# Altium PCB VOLT_CONV_PCB.PcbDoc
Units mm, origin at the board's own origin, x right, y up, seen from the top; angles counter-clockwise.
Board outline 65 x 30 mm, 2 copper layers (Top Layer, Bottom Layer); 21 components, 8 nets, 45 pads, 456 vias.
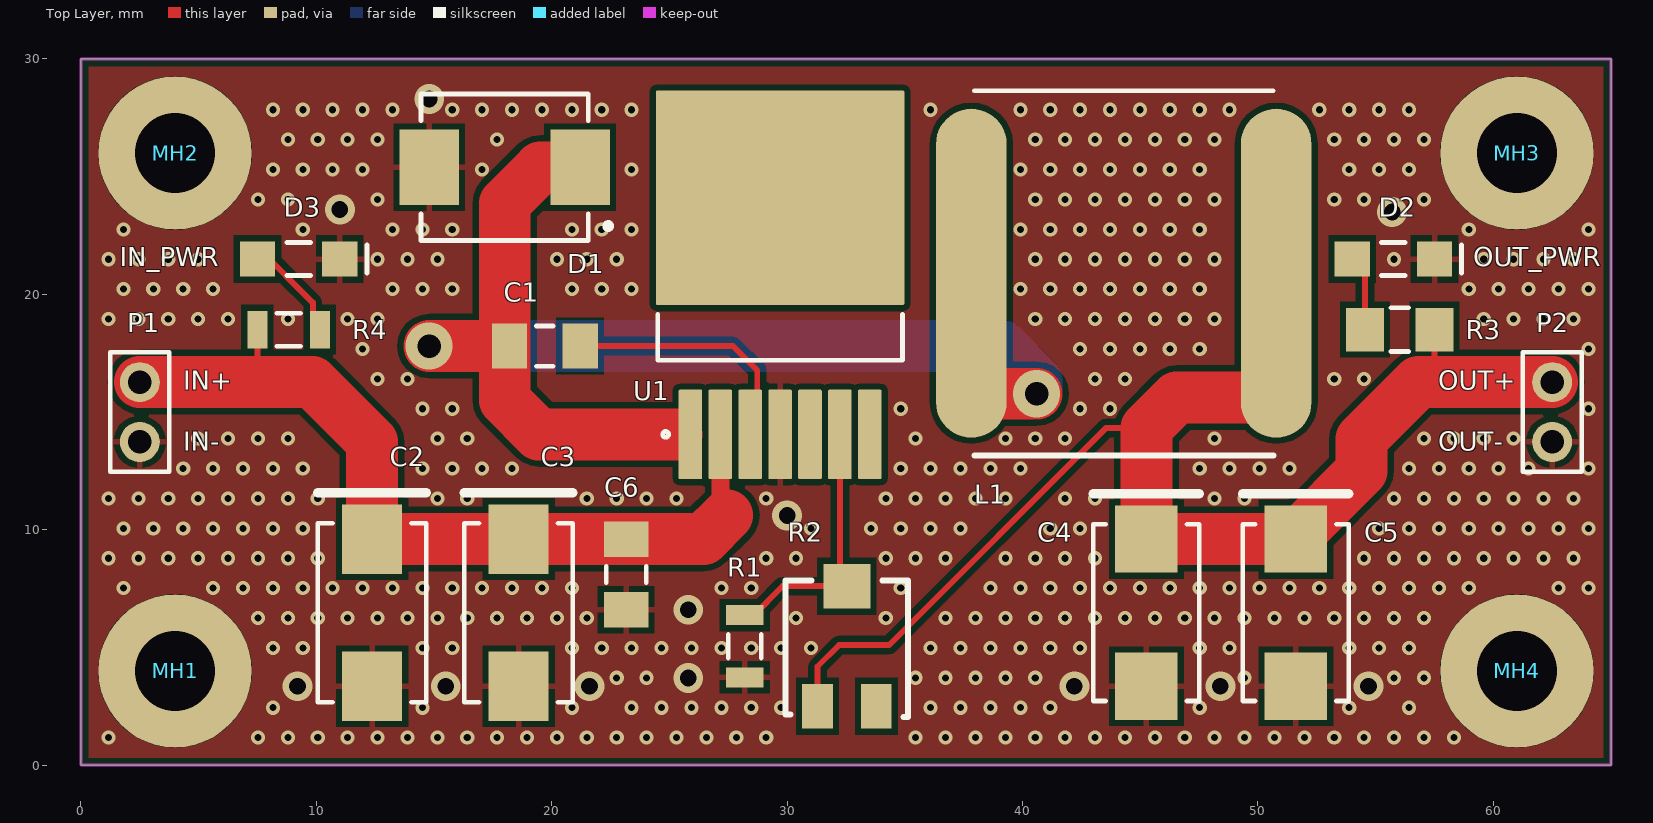
[diagram p0: Top Layer view]
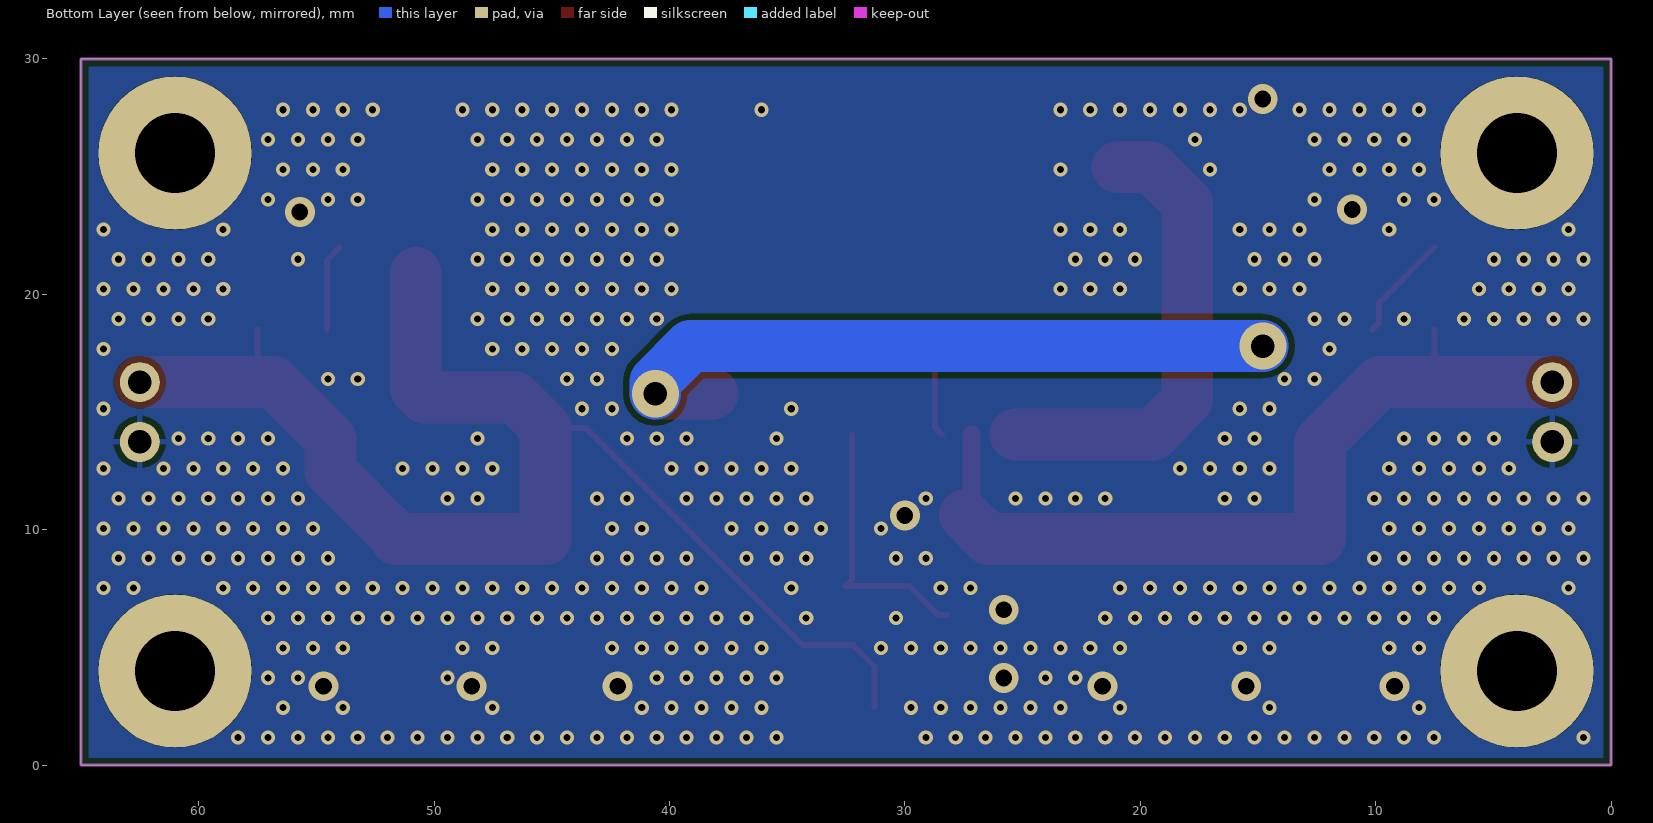
[diagram p1: Bottom Layer view, seen from below]
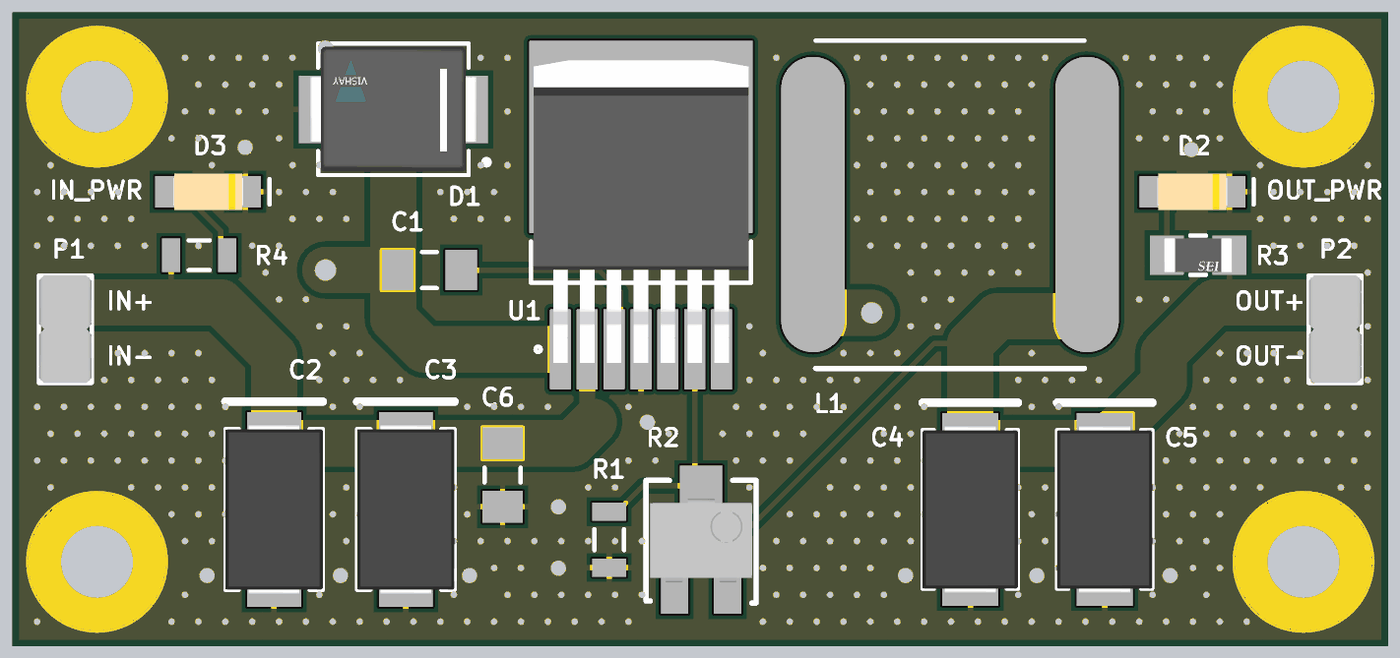
[diagram p2: 3D render of the assembled board from above, using the file's embedded part models]

## Layer stack, top to bottom
Top Solder: solder mask 0.0102, Solder Resist, Dk 3.5
Top Layer: signal copper 0.0356
Dielectric 1: dielectric 0.32, FR-4, Dk 4.8
Bottom Layer: signal copper 0.0356
Bottom Solder: solder mask 0.0102, Solder Resist, Dk 3.5

## Board outline
0,0 0,30 65,30 65,0

## Design rules (kind name [scope] priority, off if disabled: settings)
BoardOutlineClearance [All] p1: gap=0.2 ignorepadtopadclearanceinfootprint=FALSE
Clearance [All] p1: gap=0.254 ignorepadtopadclearanceinfootprint=TRUE except(0: Arc-Hole Track-Hole SMDPad-Hole THPad-Hole Via-Hole Fill-Hole Poly-Hole Region-Hole Text-Hole; 0.127: Arc-Arc Arc-Track Track-Track SMDPad-SMDPad; 0.2: Arc-SMDPad Track-SMDPad; 0.33: Arc-THPad Track-THPad; 0.5: THPad-THPad)
HoleSize [All] p1: absolutevalues=TRUE maxlimit=6.3 minlimit=0.3 maxpercent=80.000 minpercent=20.000
MinimumAnnularRing [All] p1: minimumring=0.13
MinimumSolderMaskSliver [All] p1: minsoldermaskwidth=0.2
PlaneConnect [All] p1: planeconnectstyle=Direct reliefexpansion=0.508 reliefentries=4 reliefconductorwidth=0.254 reliefairgap=0.254
PolygonConnect PolygonConnect_GNDVia [IsVia AND InNet('GND')] p1: connectstyle=Direct reliefconductorwidth=0.254 reliefentries=4 polygonreliefangle="90 Angle" airgapwidth=0.254
PolygonConnect PolygonConnect_1 [All] p2 off: connectstyle=Relief reliefconductorwidth=0.254 reliefentries=4 polygonreliefangle="90 Angle" airgapwidth=0.254
RoutingVias [All] p1: holewidth=0.711 width=1.27 viastyle="Through Hole" minholewidth=0.3 minwidth=0.6 maxholewidth=6.3 maxwidth=1.27
SilkToSolderMaskClearance [IsPad] p1: minsilkscreentomaskgap=0.15 clearancetoexposedcopper=TRUE
SolderMaskExpansion [All] p1: expansion=0.102 istentingtop=FALSE
Width [All] p1: maxlimit=20 minlimit=0.127 preferedwidth=0.254 minimp=50.000000 maximp=50.000000 favimp=50.000000
26 further rules are at their usual default settings.

## Components (designator, comment, footprint, x,y, rotation, side; value= is the part's Value field where it differs from the comment)
C1 "0.01uF" CAP_1206_AVX_1206 19.705,17.8 r180 top
C2 "68uF" CAP_2917_KEMT_T495_D 12.366,6.477 r270 top
C3 "68uF" CAP_2917_KEMT_T495_D 18.589,6.477 r270 top
C4 "100uF" CAP_2917_AVX_7343_31 45.259,6.477 r270 top
C5 "100uF" CAP_2917_AVX_7343_31 51.609,6.477 r270 top
C6 "0.1uF" CAP_1206_AVX_1206 23.161,8.102 r90 top
D1 "20V, 3A" DIO_SCHOTTKY_ON_SMC_403AG 18,25.4 r180 top
D2 "GREEN" "DIO_1206_ LTST_C150" 55.75,21.5 r0 top
D3 "GREEN" "DIO_1206_ LTST_C150" 9.25,21.5 r0 top
L1 "37uH" IND_NON_STD_LCI44 44.3,20.9 r0 top
MH1 "M3" MH_M3 4,4 r0 top
MH2 "M3" MH_M3 4,26 r0 top
MH3 "M3" MH_M3 61,26 r0 top
MH4 "M3" MH_M3 61,4 r0 top
P1 "826629-2" CONN_HEADER_MALE_0.1_2x1 2.5,15 r270 top
P2 "826629-2" CONN_HEADER_MALE_0.1_2x1 62.5,15 r270 top
R1 "1kR" RES_1206_YAGEO_RC_1206 28.2,5.05 r90 top
R2 "10kR" RES_VAR_BRN_3214X 32.54,5.05 r90 top
R3 "330R" RES_1206_SE_RMCF1206 56.024,18.5 r0 top
R4 "1kR" RES_1206_YAGEO_RC_1206 8.825,18.5 r180 top
U1 "LM2677" IC_TO_263_7_KTW0007B 29.7,20.4 r90 top

## Footprints (in the part's own frame and the unit in brackets; to place one, negate y for a bottom-side part, rotate by r counter-clockwise, add the part's x,y. Pads: shape width x height; smd on the part's side, far side on the other; paste and mask are expansions set on the pad)
CAP_1206_AVX_1206 [mm] "SMD, 2-Leads, Body 3.4x1.8mm, IPC Low Density"
  rect 1.5x1.9 smd: 1(-1.5,0) 2(1.5,0)
  silkscreen extent -0.35,-0.85 0.35,0.85, body extent -1.7,-0.9 1.7,0.9, height 1.52
CAP_2917_AVX_7343_31 [mm] "Molded Capacitor, 2-Leads, Body 7.5x4.5mm, IPC Low Density"
  rect 2.85x2.65 smd: 1(-3.125,0) 2(3.125,0)
  silkscreen extent -5.05,-2.25 3.75,2.25, body extent -3.97,-2.25 3.97,2.25, height 3.1
CAP_2917_KEMT_T495_D [mm] "Molded Capacitor, 2-Leads, Body 7.6x4.6mm, IPC Low Density"
  rect 2.95x2.55 smd: 1(-3.125,0) 2(3.125,0)
  silkscreen extent -5.1,-2.3 3.8,2.3, body extent -4.02,-2.3 4.02,2.3, height 3.1
CONN_HEADER_MALE_0.1_2x1 [mm] "Connector"
  round 1.7 hole 1: 1(-1.27,0) 2(1.27,0)
  silkscreen extent -2.54,-1.25 2.54,1.25, body extent -2.54,-1.25 2.54,1.25, height 9.51
"DIO_1206_ LTST_C150" [mm] "Diode"
  rect 1.5x1.5 smd: 1(-1.75,0) 2(1.75,0)
  silkscreen extent -0.5,-0.7 2.9,0.7, body extent -1.65,-0.85 1.65,0.85, height 1.2
DIO_SCHOTTKY_ON_SMC_403AG [mm] "Schottky Diode"
  rect 2.52x3.2 smd paste+0 mask+0: A(3.205,0) K(-3.205,0)
  silkscreen extent -4.52,-3.11 3.55,3.11, body extent -4.17,-3.21 4.17,3.21, height 0.25
IC_TO_263_7_KTW0007B [mm] "DPAK, 7-Leads, Body 9.4x10.4mm, Pitch 1.27mm, IPC Low Density"
  rrect10% 3.8x1 smd: 1(-6.35,3.81) 2(-6.35,2.54) 3(-6.35,1.27) 4(-6.35,0) 5(-6.35,-1.27) 6(-6.35,-2.54) 7(-6.35,-3.81)
  rrect1% 9.1x10.55 smd: 8(3.7,0)
  silkscreen extent -6.47,-5.2 -1.25,5.2, body extent -6.98,-5.08 7.32,5.08, height 4.58
IND_NON_STD_LCI44 [mm] "Inductor"
  rrect100% 3x13.97 smd: 1(-6.475,0) 2(6.475,0)
  silkscreen extent -6.35,-7.75 6.35,7.75, body extent -7.5,-7.8 7.5,7.8, height 9.91
MH_M3 [mm] "Mounting Holes, M3"
  round 6.5 hole 3.4: 1(0,0)
RES_1206_SE_RMCF1206 [mm] "Resistor"
  rect 1.604x1.858 smd paste+0 mask+0: 1(-1.476,0) 2(1.476,0)
  silkscreen extent -0.37,-0.93 0.37,0.93, body extent -2.78,-1.43 2.78,1.43, height 0.25
RES_1206_YAGEO_RC_1206 [mm] "Chip Resistor, 2-Leads, Body 3.10x1.60mm, IPC High Density"
  rect 0.85x1.6 smd: 1(-1.325,0) 2(1.325,0)
  silkscreen extent -0.5,-0.7 0.5,0.7, body extent -1.6,-0.85 1.6,0.85, height 0.65
RES_VAR_BRN_3214X [mm] "Variable Resistor"
  rect 1.9x1.3 smd: 1(-2.55,1.25) 3(-2.55,-1.25)
  rect 1.9x2 smd: 2(2.55,0)
  silkscreen extent -3,-2.6 2.8,2.6, body extent -2.88,-2.42 2.8,2.41, height 5.09

## Part data
C1: library part CAP_0.01uF_10%_50V, "±10% 50V Ceramic Capacitor X7R 1206 (3216 Metric)", Case/Package="1206 (3216 Metric)", Manufacturer="AVX Corporation", Manufacturer Part Number=12065C103KAT2A, Supplier Part Number 1=478-1542-1-ND, Supplier 1=Digi-Key
C2 C3: library part PCAP_68uF_10%_20V, "Molded Tantalum Capacitors 2917 (7343 Metric) 300mOhm", Case/Package="2917 (7343 Metric)", Manufacturer=KEMET, Manufacturer Part Number=T495D686K020ATE300, Supplier Part Number 1=399-11095-1-ND, Supplier 1=Digi-Key
C4 C5: library part PCAP_100uF_10%_16V, "Molded Tantalum Capacitors 2917 (7343 Metric) 125mOhm", Case/Package="2917 (7343 Metric)", Manufacturer="AVX Corporation", Manufacturer Part Number=TPSD107K016R0125, Supplier Part Number 1=478-1778-1-ND, Supplier 1=Digi-Key
C6: library part CAP_0.1uF_10%_50V, "±10% 50V Ceramic Capacitor X8R 1206 (3216 Metric)", Case/Package="1206 (3216 Metric)", Manufacturer="AVX Corporation", Manufacturer Part Number=12065F104K4T2A, Supplier Part Number 1=478-3618-1-ND, Supplier 1=Digi-Key
D1: library part DIO_SCHOTTKY_20V_3A, "Diode Schottky 3A Surface Mount SMC (DO-214AB)", Case/Package="DO-214AB, SMC", Manufacturer="ON Semiconductor", Manufacturer Part Number=SS32, Supplier Part Number 1=SS32CT-ND, Supplier 1=Digi-Key
D2 D3: library part DIO_LED_GREEN, "LED GREEN CLEAR CHIP SMD", Case/Package="1206 (3216 Metric)", Manufacturer="Lite-On Inc.", Manufacturer Part Number=LTST-C150GKT, Supplier Part Number 1=160-1169-1-ND, Supplier 1=Digi-Key
L1: library part IND_37uH_20%_2.24A, "Shielded Toroidal Inductor 100mOhm Nonstandard", Case/Package=Nonstandard, Manufacturer="Pulse Electronics Power", Manufacturer Part Number=PE-53932SNL, Supplier Part Number 1=553-1415-ND, Supplier 1=Digi-Key
MH1 MH2 MH3 MH4: library part MH_M3, "M3 Mounting Hole"
P1 P2: library part CONN_VERT_HEADER_MALE_0.1_2x1, "CONN HEADER VERT 2POS 2.54MM", Case/Package="Header, Breakaway", Manufacturer="TE Connectivity AMP Connectors", Supplier Part Number 1=A105107-ND, Manufacturer Part Number=826629-2, Supplier 1=Digi-Key
R1 R4: library part RES_1kR_1%_0.25W, "±1% 0.25W, 1/4W Chip Resistor 1206 (3216 Metric) Moisture Resistant Thick Film", Case/Package="1206 (3216 Metric)", Manufacturer=Yageo, Manufacturer Part Number=RC1206FR-071KL, Supplier Part Number 1=311-1.00KFRCT-ND, Supplier 1=Digi-Key
R2: library part RES_VAR_10kR_10%_0.25W, "0.25W, 1/4W Gull Wing Surface Mount Trimmer Potentiometer Cermet Turn Top Adjustment", Case/Package="Surface Mount", Manufacturer="Bourns Inc.", Manufacturer Part Number=3214X-1-103E, Supplier Part Number 1=3214X-1-103ECT-ND, Supplier 1=Digi-Key
R3: library part RES_330R_5%_0.25W, "±5% 0.25W, 1/4W Chip Resistor 1206 (3216 Metric) Automotive AEC-Q200 Thick Film", Case/Package="1206 (3216 Metric)", Manufacturer="Stackpole Electronics Inc", Manufacturer Part Number=RMCF1206JT330R, Supplier Part Number 1=RMCF1206JT330RCT-ND, Supplier 1=Digi-Key
U1: library part IC_LM2677, "Buck Switching Regulator IC Positive Adjustable 1.21V 1 Output 5A TO-263-8, D²Pak (7 Leads + Tab), TO-263CA", Case/Package="TO-263-8, D²Pak (7 Leads + Tab), TO-263CA", Manufacturer="Texas Instruments", Manufacturer Part Number=LM2677S-ADJ/NOPB, Supplier Part Number 1=LM2677S-ADJ/NOPB-ND, Supplier 1=Digi-Key

## Via types
v1: diameter 0.6, hole 0.3, Top Layer to Bottom Layer, tented both sides, 442 vias
v2: diameter 1.27, hole 0.711, Top Layer to Bottom Layer, tented both sides, 12 vias
v3: diameter 2, hole 1, Top Layer to Bottom Layer, tented both sides, 2 vias

## Nets (pads, with @x,y where several pads share a name; then routed paths per layer and width w, separated by ;. In a path a pad name is that pad's centre, name@x,y a point inside that pad or via, vN(x,y) a via of type N, cw(c..) or ccw(c..) an arc to the next point about the centre after c; other vN are vias at no path point)
GND: C2.2 C3.2 C4.2 C5.2 C6.1 D1.A D2.2 D3.2 MH1.1 MH2.1 MH3.1 MH4.1 P1.2 P2.2 R1.1 U1.4
  other v1: 1.17,1.17 7.52,1.17 8.79,1.17 10.06,1.17 11.33,1.17 12.6,1.17 13.87,1.17 15.14,1.17 16.41,1.17 17.68,1.17 18.95,1.17 20.22,1.17 21.49,1.17 22.76,1.17 24.03,1.17 25.3,1.17 26.57,1.17 27.84,1.17 29.11,1.17 35.46,1.17 36.73,1.17 38,1.17 39.27,1.17 40.54,1.17 41.81,1.17 43.08,1.17 44.35,1.17 45.62,1.17 46.89,1.17 48.16,1.17 49.43,1.17 50.7,1.17 51.97,1.17 53.24,1.17 54.51,1.17 55.78,1.17 57.05,1.17 58.32,1.17 8.155,2.44 14.505,2.44 20.855,2.44 23.395,2.44 24.665,2.44 25.935,2.44 27.205,2.44 28.475,2.44 29.745,2.44 36.095,2.44 37.365,2.44 38.635,2.44 39.905,2.44 41.175,2.44 47.525,2.44 53.875,2.44 56.415,2.44 22.76,3.71 24.03,3.71 35.46,3.71 36.73,3.71 38,3.71 39.27,3.71 40.54,3.71 49.43,3.71 55.78,3.71 57.05,3.71 8.155,4.98 9.425,4.98 14.505,4.98 15.775,4.98 20.855,4.98 22.125,4.98 23.395,4.98 24.665,4.98 25.935,4.98 27.205,4.98 28.475,4.98 29.745,4.98 31.015,4.98 36.095,4.98 37.365,4.98 38.635,4.98 39.905,4.98 41.175,4.98 42.445,4.98 47.525,4.98 48.795,4.98 53.875,4.98 55.145,4.98 56.415,4.98 7.52,6.25 8.79,6.25 10.06,6.25 11.33,6.25 12.6,6.25 13.87,6.25 15.14,6.25 16.41,6.25 17.68,6.25 18.95,6.25 20.22,6.25 21.49,6.25 30.38,6.25 34.19,6.25 36.73,6.25 38,6.25 39.27,6.25 40.54,6.25 41.81,6.25 43.08,6.25 44.35,6.25 45.62,6.25 46.89,6.25 48.16,6.25 49.43,6.25 50.7,6.25 51.97,6.25 53.24,6.25 54.51,6.25 55.78,6.25 57.05,6.25 1.805,7.52 5.615,7.52 6.885,7.52 8.155,7.52 9.425,7.52 10.695,7.52 11.965,7.52 13.235,7.52 14.505,7.52 15.775,7.52 17.045,7.52 18.315,7.52 19.585,7.52 20.855,7.52 27.205,7.52 28.475,7.52 34.825,7.52 38.635,7.52 39.905,7.52 41.175,7.52 42.445,7.52 43.715,7.52 44.985,7.52 46.255,7.52 47.525,7.52 48.795,7.52 50.065,7.52 51.335,7.52 52.605,7.52 53.875,7.52 55.145,7.52 56.415,7.52 57.685,7.52 58.955,7.52 62.765,7.52 64.035,7.52 1.17,8.79 2.44,8.79 3.71,8.79 4.98,8.79 6.25,8.79 7.52,8.79 8.79,8.79 10.06,8.79 29.11,8.79 30.38,8.79 34.19,8.79 35.46,8.79 36.73,8.79 39.27,8.79 40.54,8.79 41.81,8.79 43.08,8.79 54.51,8.79 55.78,8.79 57.05,8.79 58.32,8.79 59.59,8.79 60.86,8.79 62.13,8.79 63.4,8.79 1.805,10.06 3.075,10.06 4.345,10.06 5.615,10.06 6.885,10.06 8.155,10.06 9.425,10.06 31.015,10.06 33.555,10.06 34.825,10.06 36.095,10.06 37.365,10.06 41.175,10.06 42.445,10.06 55.145,10.06 56.415,10.06 57.685,10.06 58.955,10.06 60.225,10.06 61.495,10.06 62.765,10.06 64.035,10.06 1.17,11.33 2.44,11.33 3.71,11.33 4.98,11.33 6.25,11.33 7.52,11.33 8.79,11.33 10.06,11.33 15.14,11.33 16.41,11.33 21.49,11.33 22.76,11.33 24.03,11.33 25.3,11.33 29.11,11.33 34.19,11.33 35.46,11.33 36.73,11.33 38,11.33 39.27,11.33 41.81,11.33 43.08,11.33 48.16,11.33 49.43,11.33 55.78,11.33 57.05,11.33 58.32,11.33 59.59,11.33 60.86,11.33 62.13,11.33 63.4,11.33 4.345,12.6 5.615,12.6 6.885,12.6 8.155,12.6 9.425,12.6 14.505,12.6 15.775,12.6 17.045,12.6 18.315,12.6 34.825,12.6 36.095,12.6 37.365,12.6 38.635,12.6 39.905,12.6 47.525,12.6 48.795,12.6 50.065,12.6 51.335,12.6 56.415,12.6 57.685,12.6 58.955,12.6 60.225,12.6 61.495,12.6 64.035,12.6 4.98,13.87 6.25,13.87 7.52,13.87 8.79,13.87 15.14,13.87 16.41,13.87 35.46,13.87 39.27,13.87 40.54,13.87 41.81,13.87 48.16,13.87 57.05,13.87 58.32,13.87 59.59,13.87 60.86,13.87 14.505,15.14 15.775,15.14 34.825,15.14 42.445,15.14 43.715,15.14 64.035,15.14 12.6,16.41 13.87,16.41 43.08,16.41 44.35,16.41 53.24,16.41 54.51,16.41 11.965,17.68 42.445,17.68 43.715,17.68 44.985,17.68 46.255,17.68 47.525,17.68 64.035,17.68 1.17,18.95 2.44,18.95 3.71,18.95 4.98,18.95 6.25,18.95 8.79,18.95 11.33,18.95 12.6,18.95 40.54,18.95 41.81,18.95 43.08,18.95 44.35,18.95 45.62,18.95 46.89,18.95 48.16,18.95 59.59,18.95 60.86,18.95 62.13,18.95 63.4,18.95 1.805,20.22 3.075,20.22 4.345,20.22 5.615,20.22 13.235,20.22 14.505,20.22 15.775,20.22 20.855,20.22 22.125,20.22 23.395,20.22 39.905,20.22 41.175,20.22 42.445,20.22 43.715,20.22 44.985,20.22 46.255,20.22 47.525,20.22 58.955,20.22 60.225,20.22 61.495,20.22 62.765,20.22 64.035,20.22 1.17,21.49 2.44,21.49 3.71,21.49 4.98,21.49 12.6,21.49 13.87,21.49 15.14,21.49 20.22,21.49 21.49,21.49 22.76,21.49 40.54,21.49 41.81,21.49 43.08,21.49 44.35,21.49 45.62,21.49 46.89,21.49 48.16,21.49 55.78,21.49 59.59,21.49 60.86,21.49 62.13,21.49 63.4,21.49 1.805,22.76 9.425,22.76 13.235,22.76 14.505,22.76 15.775,22.76 20.855,22.76 22.125,22.76 23.395,22.76 39.905,22.76 41.175,22.76 42.445,22.76 43.715,22.76 44.985,22.76 46.255,22.76 47.525,22.76 58.955,22.76 64.035,22.76 7.52,24.03 8.79,24.03 12.6,24.03 40.54,24.03 41.81,24.03 43.08,24.03 44.35,24.03 45.62,24.03 46.89,24.03 48.16,24.03 53.24,24.03 54.51,24.03 57.05,24.03 8.155,25.3 9.425,25.3 10.695,25.3 11.965,25.3 17.045,25.3 23.395,25.3 39.905,25.3 41.175,25.3 42.445,25.3 43.715,25.3 44.985,25.3 46.255,25.3 47.525,25.3 53.875,25.3 55.145,25.3 56.415,25.3 8.79,26.57 10.06,26.57 11.33,26.57 12.6,26.57 17.68,26.57 40.54,26.57 41.81,26.57 43.08,26.57 44.35,26.57 45.62,26.57 46.89,26.57 48.16,26.57 53.24,26.57 54.51,26.57 55.78,26.57 57.05,26.57 8.155,27.84 9.425,27.84 10.695,27.84 11.965,27.84 13.235,27.84 15.775,27.84 17.045,27.84 18.315,27.84 19.585,27.84 20.855,27.84 22.125,27.84 23.395,27.84 36.095,27.84 39.905,27.84 41.175,27.84 42.445,27.84 43.715,27.84 44.985,27.84 46.255,27.84 47.525,27.84 48.795,27.84 52.605,27.84 53.875,27.84 55.145,27.84 56.415,27.84
  other v2: 9.2,3.352 15.5,3.352 21.6,3.352 42.2,3.352 48.4,3.352 54.7,3.352 25.8,3.7 25.8,6.6 30,10.6 55.7,23.5 11,23.6 14.795,28.3
NetC1_1: C1.1 U1.3 | length 10.8
  Top Layer w0.254: C1.1 27.7,17.8 28.73,16.77 28.73,14.35 U1.3
NetC1_2: C1.2 D1.K L1.1 U1.1 | length 52.5
  Top Layer w2.2: v3(14.795,17.8) C1.2@18,17.8 ; D1.K@20.965,25.4 19.529,25.4 18,23.871 C1.2@18,17.8 ; 25.306,14.05 19.45,14.05 18,15.5 C1.2@18,17.8 ; L1.1@38.165,15.775 v3(40.6,15.775)
  Bottom Layer w2.2: v3(14.795,17.8) 39.1,17.8 40.6,16.3 v3(40.6,15.775)
NetC2_1: C2.1 C3.1 C6.2 P1.1 R4.2 U1.2 | length 36.4
  Top Layer w0.254: 7.5,16.27 R4.2
  Top Layer w0.762: U1.2 27.16,10.915 27.46,10.615
  Top Layer w2.2: P1.1 7.5,16.27 9.83,16.27 12.366,13.734 C2.1 C3.1 C6.2 26.447,9.602 27.46,10.615
NetC4_1: C4.1 C5.1 L1.2 P2.1 R2.1 R3.2 | length 58.7
  Top Layer w0.254: R2.1 31.29,4.19 32.2,5.1 34.328,5.1 43.555,14.327 45.259,14.327 ; 56.816,16.27 57.5,16.954 R3.2
  Top Layer w2.2: L1.2 50.775,15.985 50.405,15.616 46.548,15.616 45.259,14.327 C4.1 C5.1 ; C5.1@51.834,9.927 54.4,12.493 54.4,13.854 56.816,16.27 P2.1
NetD2_1: D2.1 R3.1 | length 3.7
  Top Layer w0.254: D2.1@54,22 54.549,21.451 R3.1
NetD3_1: D3.1 R4.1 | length 4.6
  Top Layer w0.254: D3.1@7.5,22 9.852,19.648 9.852,18.798 R4.1
NetR1_2: R1.2 R2.2 U1.6 | length 11.4
  Top Layer w0.254: R1.2 28.575,6.375 29.8,7.6 R2.2 32.24,7.9 U1.6
pads on no net: R2.3 U1.5 U1.7 U1.8

## Polygon pours and split planes (outlines as drawn)
GND on Bottom Layer "GND" (solid, remove dead copper, pour order 1): 0,0 0,30 65,30 65,0
GND on Top Layer "GND" (solid, remove dead copper, pour order 0): 0,0 0,30 65,30 65,0

## Keep-outs
Keep-Out Layer:
  the board outline again, w0.127

## Silkscreen, mask and mechanical layers (free items; w line width, h text height)
Top Overlay:
  text "IN_PWR" at 1.652,21.188 h0.81
  text "OUT_PWR" at 59.152,21.188 h0.81
  text "IN+" at 4.352,15.952 h0.81
  text "OUT+" at 57.652,15.952 h0.81
  text "IN-" at 4.352,13.352 h0.81
  text "OUT-" at 57.652,13.352 h0.81
Mechanical 1:
  the board outline again, w0.2